# Altium PCB Flight_Computer_1.PcbDoc (part 4 of 4)
Units mm, origin at the board's own origin, x right, y up, seen from the top; angles counter-clockwise.
Board outline 101.6 x 76.2 mm, 4 copper layers (Top Layer, GND, 3.3V, Bottom Layer), stack 1.574 mm thick; 111 components, 86 nets, 493 pads, 1677 vias.
Unrouted connection lines stored in the file: 302.
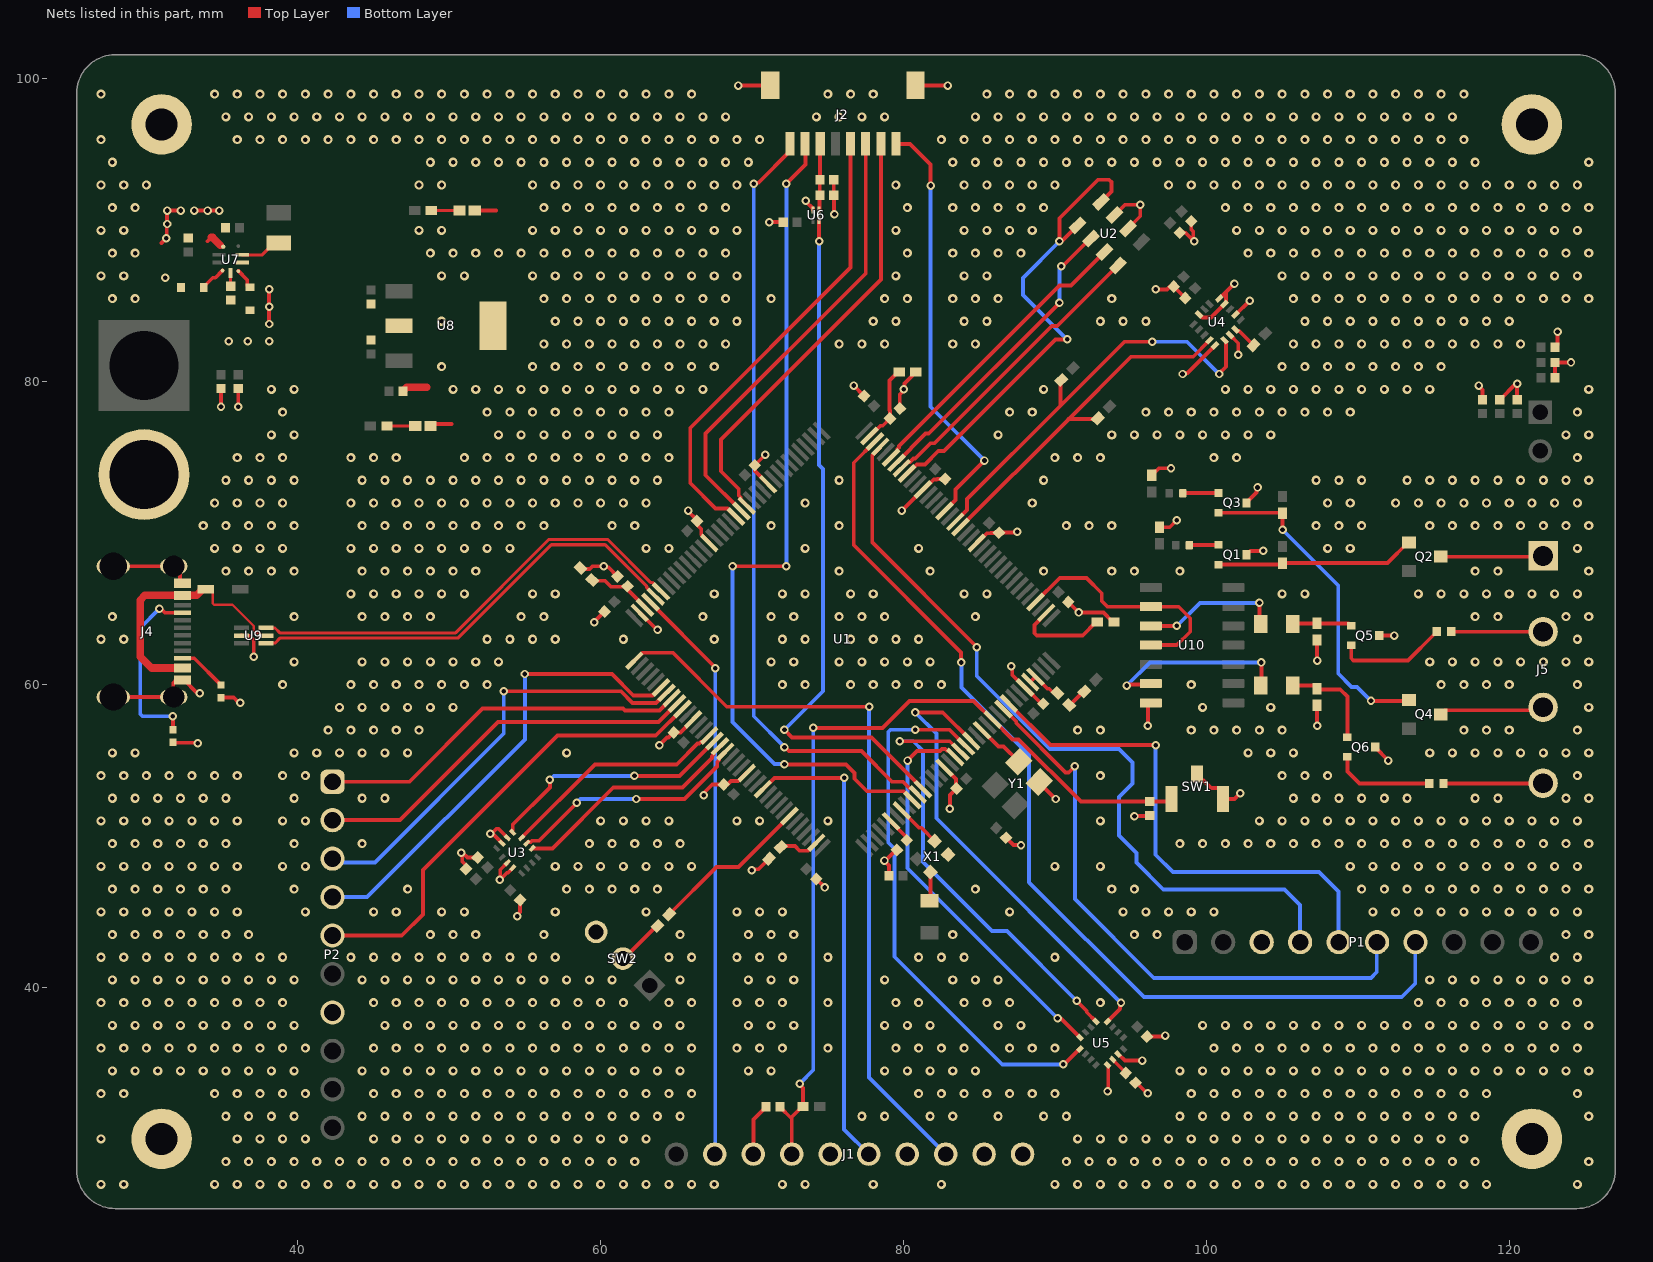
[diagram p4: the nets of this part, all layers, seen from the top]

## Via types
v1: diameter 0.6, hole 0.3, Top Layer to Bottom Layer, 1516 vias
v2: diameter 0.559, hole 0.305, Top Layer to Bottom Layer, 161 vias

## Nets (pads, with @x,y where several pads share a name; then routed paths per layer and width w, separated by ;. In a path a pad name is that pad's centre, name@x,y a point inside that pad or via, vN(x,y) a via of type N, cw(c..) or ccw(c..) an arc to the next point about the centre after c; other vN are vias at no path point) (continued)
GND: C1.1 C2.2 C3.1 C4.1 C5.1 C6.1 C7.1 C8.1 C9.1 C10.1 C11.1 C12.1 C13.1 C14.1 C15.2 C16.1 C17.2 C18.1 C19.1 C20.1 C21.2 C22.2 C23.1 C24.1 C25.1 C26.1 C27.1 C28.1 C29.2 C30.2 C31.2 C32.2 C33.2 C34.2 C35.2 C36.2 C37.2 C38.2 C39.2 C40.2 C41.2 C42.2 C43.2 C44.2 C45.2 D2.1 D3.1 H1.1 H2.1 H3.1 H4.1 J1.3 J1.5 J1.7 J1.9 J1.10 J2.9 J2.10 J3.N J4.A1B12 J4.B1A12 J4.S1 J4.S2 J4.S3 J4.S4 P1.3 P2.7 Q1.3 Q3.3 Q5.3 Q6.3 R5.2 R6.2 R11.1 R16.1 R18.1 R19.1 R22.2 R24.2 R25.2 R26.2 R28.2 R29.2 SW1.2 SW1.3 SW2.3 U1.16 U1.31 U1.51 U1.61 U1.83 U1.94 U1.107 U1.120 U1.130 U2.2 U2.3 U3.2 U3.3 U3.6 U3.7 U4.5 U4.7 U4.10 U4.12 U4.13 U4.16 U5.9 U5.11 U6.4 U7.1 U7.4 U8.2 U8.4 U9.2 U10.7 X1.2 Y1.2 | length 147.2
  Top Layer w0.254: J4.S4@27.65,59.18 31.65,59.18 31.777,59.307 31.777,60.127 31.95,60.3 32.225,60.3 32.5,60.3 33.305,59.494 33.47,59.494 v2(33.528,59.436) ; J4.S3@27.65,67.82 31.65,67.82 31.848,67.82 32.225,67.443 J4.A1B12@32.225,66.7 ; 30.994,89.16 v2(31.305,89.471) 31.337,89.503 31.337,90.392 v2(31.369,90.424) v2(31.369,91.313) v2(32.258,91.313) ; R28.2@31.75,56.195 31.78,56.164 33.371,56.164 v2(33.401,56.134) ; v2(33.147,91.313) v2(34.036,91.313) v2(34.798,91.313) ; 34.036,89.281 34.163,89.408 ; R29.2@34.925,59.149 35.765,59.149 36.113,58.801 v2(36.195,58.801) ; v2(34.925,78.359) C22.2@34.925,79.55 ; v2(36.068,78.359) C21.2@36.068,79.55 ; U9.2@36.279,63.246 36.302,63.223 36.806,63.223 37.084,62.945 v2(37.084,61.849) ; v2(38.1,83.82) v2(38.1,84.963) v2(38.1,86.106) ; D3.1@48.752,77.089 48.879,77.216 50.165,77.216 ; C5.1@51.11,47.823 51.117,47.83 51.117,48.075 50.858,48.333 50.858,48.837 v2(50.8,48.895) 50.882,48.895 51.199,48.578 51.865,48.578 C6.1@51.872,48.585 ; D2.1@51.681,91.313 53.086,91.313 ; U3.3@53.484,49.541 52.918,50.107 52.763,50.107 v2(52.705,50.165) 52.787,50.165 53.113,50.491 53.241,50.491 U3.2@53.837,49.894 ; U3.6@53.838,48.25 53.365,47.777 53.365,47.142 v2(53.34,47.117) 53.807,47.584 53.876,47.584 54.189,47.897 U3.7@54.192,47.897 ; v2(54.483,44.704) 54.483,44.786 54.674,44.978 54.674,45.769 C7.1@54.681,45.776 ; R22.2@58.666,67.699 58.719,67.646 59.279,67.646 59.451,67.818 v2(60.198,67.818) 60.256,67.76 60.51,67.76 C43.2@61.116,67.154 ; v2(59.563,64.135) C35.2@60.254,64.826 ; U1.107@62.573,64.751 62.602,64.751 63.726,63.627 v2(63.754,63.627) ; v2(63.881,56.007) 64.375,56.501 64.487,56.501 C36.2@64.826,56.84 ; C36.2@64.833,56.847 65.259,56.847 U1.120@66.109,57.697 ; v2(65.786,71.501) 65.786,71.445 66.365,70.866 66.365,70.566 66.642,70.289 66.642,69.908 67.17,69.38 U1.94@67.17,69.347 ; v2(66.802,52.705) 66.86,52.763 66.86,52.897 67.368,53.404 68.121,53.404 C33.2@68.128,53.411 68.372,53.411 68.595,53.634 69.084,53.634 69.612,54.162 U1.130@69.645,54.162 ; v2(69.088,99.568) 71.18,99.568 J2.10@71.2,99.588 ; v2(69.977,47.752) 70.035,47.81 70.416,47.81 R25.2@71.112,48.506 ; J1.3@70.08,29 70.08,31.287 70.914,32.121 C1.1@70.914,32.131 ; C38.2@70.175,74.493 v2(70.866,75.184) ; C38.2@70.182,74.486 70.182,74.113 U1.83@71.059,73.237 ; v2(71.12,90.551) C12.1@72.057,90.551 ; v2(73.533,91.948) 73.533,91.926 74.022,91.436 U6.4@74.022,91.353 ; C32.2@74.239,47.173 v2(74.803,46.609) ; C14.1@75.39,93.345 75.39,92.319 75.414,92.295 75.414,91.083 v2(75.438,91.059) ; v2(76.708,79.756) C31.2@77.399,79.065 ; C2.2@79.042,47.371 79.042,48.062 78.74,48.364 v2(78.74,48.387) 78.803,48.387 79.494,49.078 C45.2@79.558,49.078 ; C44.2@79.757,78.234 79.75,78.241 79.75,79.16 80.01,79.42 v2(80.01,79.502) 80.068,79.56 80.068,79.899 80.566,80.397 80.566,80.472 80.739,80.645 R24.2@80.814,80.645 ; v2(79.883,71.501) 79.898,71.501 81.28,72.883 U1.61@81.295,72.883 81.327,72.883 81.998,73.554 82.196,73.554 82.224,73.582 82.741,73.582 C30.2@82.748,73.589 ; J2.9@80.8,99.588 80.82,99.568 v2(82.931,99.568) ; U1.16@82.709,54.515 83.46,53.764 83.46,53.421 83.495,53.386 C40.2@83.495,53.142 83.058,52.705 v2(83.058,51.816) ; U1.51@84.83,69.347 84.863,69.347 85.513,69.998 85.752,69.998 85.78,70.026 86.297,70.026 C37.2@86.304,70.033 86.311,70.04 87.356,70.04 87.421,70.104 v2(87.503,70.104) ; C41.2@86.769,49.889 87.251,49.408 87.752,49.408 v2(87.757,49.403) ; v2(87.122,61.214) 87.18,61.156 87.18,60.651 U1.31@88.012,59.819 88.045,59.819 89.118,58.745 C29.2@89.225,58.745 ; Y1.2@88.953,53.573 88.953,53.541 v2(90.043,52.451) ; C34.2@90.876,65.461 v2(91.567,64.77) 93.194,64.77 93.432,64.532 93.432,64.523 93.82,64.135 R26.2@93.895,64.135 ; U5.9@93.462,34.89 93.516,34.836 93.516,33.191 v2(93.472,33.147) ; U2.3@93.935,91.009 94.62,91.694 v2(95.631,91.694) 95.631,90.937 U2.2@94.819,90.125 ; U5.11@94.169,35.597 94.205,35.597 94.623,35.179 v2(95.758,35.179) ; v2(95.25,51.308) 95.274,51.332 96.242,51.332 C42.2@96.266,51.356 ; C11.1@95.321,33.711 95.385,33.711 96.075,33.02 v2(96.139,33.02) ; C10.1@96.083,36.759 96.09,36.766 97.135,36.766 97.2,36.83 v2(97.282,36.83) ; v2(96.139,57.277) 96.139,58.628 96.312,58.801 U10.7@96.332,58.801 ; R16.1@96.393,73.829 96.393,73.904 96.566,74.077 96.641,74.077 96.859,74.295 v2(97.663,74.295) ; v2(96.647,86.106) 97.404,86.106 97.594,86.296 97.839,86.296 C8.1@97.846,86.289 C9.1@98.608,85.527 ; R11.1@96.901,70.4 97.578,70.4 v2(98.044,70.866) ; C4.1@98.242,89.845 98.249,89.852 98.494,89.852 98.501,89.845 98.623,89.845 v2(99.187,89.281) 99.129,89.339 99.129,89.936 98.997,90.067 98.997,90.6 C3.1@99.004,90.607 ; v2(98.425,80.518) 98.483,80.576 98.755,80.576 U4.5@100.57,82.391 ; SW1.3@99.392,54.101 99.392,53.951 99.665,53.678 99.815,53.678 100.319,53.174 100.819,53.174 101.092,52.901 SW1.2@101.092,52.451 101.854,52.451 v2(102.235,52.832) ; U4.16@99.509,84.442 99.541,84.442 99.742,84.241 100.298,84.241 U4.12@101.206,85.149 ; U4.13@100.852,85.503 100.861,85.503 101.353,85.995 ; U4.12@101.294,85.237 101.294,85.936 101.353,85.995 ; U4.7@101.56,83.098 102.108,82.55 v2(102.108,81.788) ; v2(101.854,86.487) 101.845,86.487 101.353,85.995 ; U4.10@101.913,84.442 101.941,84.442 102.843,85.344 v2(102.87,85.344) ; Q1.3@102.652,68.58 102.652,68.605 102.8,68.753 102.825,68.753 102.906,68.834 v2(103.759,68.834) ; Q3.3@102.652,72.009 102.652,72.034 103.32,72.702 103.32,72.967 v2(103.378,73.025) ; v2(107.315,57.277) R19.1@107.315,58.632 ; v2(107.315,61.595) R18.1@107.315,62.95 ; Q6.3@111.161,55.88 111.161,55.855 112.014,55.002 v2(112.014,54.991) ; Q5.3@111.415,63.246 v2(112.395,63.246) ; v2(117.983,79.756) 117.983,79.72 118.237,79.466 C24.1@118.237,78.819 ; C25.1@119.38,78.819 119.39,78.819 120.454,79.883 v2(120.523,79.883) C23.1@120.523,78.819 ; C28.1@123.015,80.264 C26.1@123.015,81.28 v2(124.079,81.28) ; C27.1@123.015,82.296 123.188,82.469 123.188,82.65 123.19,82.652 v2(123.19,83.312)
  Top Layer w0.5: 34.29,89.535 34.363,89.535 34.885,89.013 ; C19.1@46.942,79.375 46.942,79.385 46.992,79.435 47.002,79.435 47.196,79.629 48.514,79.629
  other v1: 27,27 28.5,27 34.5,27 36,27 37.5,27 39,27 40.5,27 42,27 43.5,27 45,27 46.5,27 48,27 49.5,27 51,27 52.5,27 54,27 55.5,27 57,27 58.5,27 60,27 61.5,27 63,27 64.5,27 66,27 67.5,27 72,27 73.5,27 78,27 82.5,27 90,27 91.5,27 93,27 94.5,27 96,27 97.5,27 99,27 100.5,27 102,27 103.5,27 105,27 106.5,27 108,27 109.5,27 111,27 112.5,27 114,27 115.5,27 117,27 118.5,27 124.5,27 35.25,28.5 36.75,28.5 38.25,28.5 39.75,28.5 41.25,28.5 42.75,28.5 44.25,28.5 45.75,28.5 47.25,28.5 48.75,28.5 50.25,28.5 51.75,28.5 53.25,28.5 54.75,28.5 56.25,28.5 57.75,28.5 59.25,28.5 60.75,28.5 62.25,28.5 90.75,28.5 92.25,28.5 93.75,28.5 95.25,28.5 96.75,28.5 98.25,28.5 99.75,28.5 101.25,28.5 102.75,28.5 104.25,28.5 105.75,28.5 107.25,28.5 108.75,28.5 110.25,28.5 111.75,28.5 113.25,28.5 114.75,28.5 116.25,28.5 117.75,28.5 125.25,28.5 27,30 36,30 37.5,30 39,30 40.5,30 45,30 46.5,30 48,30 49.5,30 51,30 52.5,30 54,30 55.5,30 57,30 58.5,30 60,30 61.5,30 63,30 91.5,30 93,30 94.5,30 96,30 97.5,30 99,30 100.5,30 102,30 103.5,30 105,30 106.5,30 108,30 109.5,30 111,30 112.5,30 114,30 115.5,30 117,30 35.25,31.5 36.75,31.5 38.25,31.5 39.75,31.5 44.25,31.5 45.75,31.5 47.25,31.5 48.75,31.5 50.25,31.5 51.75,31.5 53.25,31.5 54.75,31.5 56.25,31.5 57.75,31.5 59.25,31.5 60.75,31.5 62.25,31.5 63.75,31.5 65.25,31.5 77.25,31.5 78.75,31.5 81.75,31.5 83.25,31.5 86.25,31.5 89.25,31.5 90.75,31.5 98.25,31.5 99.75,31.5 101.25,31.5 102.75,31.5 104.25,31.5 105.75,31.5 107.25,31.5 108.75,31.5 110.25,31.5 111.75,31.5 113.25,31.5 114.75,31.5 116.25,31.5 117.75,31.5 125.25,31.5 27,33 28.5,33 34.5,33 36,33 37.5,33 39,33 40.5,33 45,33 46.5,33 48,33 49.5,33 51,33 52.5,33 54,33 55.5,33 57,33 58.5,33 60,33 61.5,33 63,33 64.5,33 66,33 81,33 82.5,33 84,33 85.5,33 87,33 88.5,33 90,33 99,33 100.5,33 102,33 103.5,33 105,33 106.5,33 108,33 109.5,33 111,33 112.5,33 114,33 115.5,33 117,33 118.5,33 124.5,33 27.75,34.5 29.25,34.5 30.75,34.5 32.25,34.5 33.75,34.5 35.25,34.5 36.75,34.5 38.25,34.5 39.75,34.5 44.25,34.5 45.75,34.5 47.25,34.5 48.75,34.5 50.25,34.5 51.75,34.5 53.25,34.5 54.75,34.5 56.25,34.5 57.75,34.5 59.25,34.5 60.75,34.5 62.25,34.5 63.75,34.5 65.25,34.5 69.75,34.5 71.25,34.5 78.75,34.5 80.25,34.5 81.75,34.5 83.25,34.5 84.75,34.5 98.25,34.5 99.75,34.5 101.25,34.5 102.75,34.5 104.25,34.5 105.75,34.5 107.25,34.5 108.75,34.5 110.25,34.5 111.75,34.5 113.25,34.5 114.75,34.5 116.25,34.5 117.75,34.5 119.25,34.5 120.75,34.5 122.25,34.5 123.75,34.5 125.25,34.5 27,36 28.5,36 30,36 31.5,36 33,36 34.5,36 36,36 37.5,36 39,36 40.5,36 45,36 46.5,36 48,36 49.5,36 51,36 52.5,36 54,36 55.5,36 57,36 58.5,36 60,36 61.5,36 63,36 64.5,36 66,36 69,36 70.5,36 72,36 75,36 79.5,36 81,36 82.5,36 84,36 87,36 88.5,36 90,36 100.5,36 102,36 103.5,36 105,36 106.5,36 108,36 109.5,36 111,36 112.5,36 114,36 115.5,36 117,36 118.5,36 120,36 121.5,36 123,36 124.5,36 27.75,37.5 29.25,37.5 30.75,37.5 32.25,37.5 33.75,37.5 35.25,37.5 36.75,37.5 38.25,37.5 39.75,37.5 45.75,37.5 47.25,37.5 48.75,37.5 50.25,37.5 51.75,37.5 53.25,37.5 54.75,37.5 56.25,37.5 57.75,37.5 59.25,37.5 60.75,37.5 62.25,37.5 63.75,37.5 65.25,37.5 69.75,37.5 71.25,37.5 72.75,37.5 78.75,37.5 80.25,37.5 81.75,37.5 86.25,37.5 87.75,37.5 99.75,37.5 101.25,37.5 102.75,37.5 104.25,37.5 105.75,37.5 107.25,37.5 108.75,37.5 110.25,37.5 111.75,37.5 113.25,37.5 114.75,37.5 116.25,37.5 117.75,37.5 119.25,37.5 120.75,37.5 122.25,37.5 123.75,37.5 125.25,37.5 27,39 28.5,39 30,39 31.5,39 33,39 34.5,39 36,39 37.5,39 39,39 45,39 46.5,39 48,39 49.5,39 51,39 52.5,39 54,39 55.5,39 57,39 58.5,39 60,39 61.5,39 64.5,39 66,39 69,39 70.5,39 72,39 75,39 79.5,39 81,39 84,39 85.5,39 87,39 93,39 114,39 115.5,39 117,39 118.5,39 120,39 121.5,39 123,39 124.5,39 27.75,40.5 29.25,40.5 30.75,40.5 32.25,40.5 33.75,40.5 35.25,40.5 36.75,40.5 38.25,40.5 39.75,40.5 44.25,40.5 45.75,40.5 47.25,40.5 48.75,40.5 50.25,40.5 51.75,40.5 53.25,40.5 54.75,40.5 56.25,40.5 57.75,40.5 59.25,40.5 60.75,40.5 65.25,40.5 69.75,40.5 71.25,40.5 72.75,40.5 78.75,40.5 83.25,40.5 84.75,40.5 86.25,40.5 114.75,40.5 116.25,40.5 117.75,40.5 119.25,40.5 120.75,40.5 122.25,40.5 123.75,40.5 125.25,40.5 27,42 28.5,42 30,42 31.5,42 33,42 34.5,42 36,42 37.5,42 39,42 43.5,42 45,42 46.5,42 48,42 49.5,42 51,42 52.5,42 54,42 55.5,42 57,42 64.5,42 66,42 69,42 70.5,42 72,42 75,42 81,42 82.5,42 84,42 90,42 123,42 124.5,42 27.75,43.5 29.25,43.5 30.75,43.5 32.25,43.5 33.75,43.5 35.25,43.5 36.75,43.5 48.75,43.5 50.25,43.5 51.75,43.5 56.25,43.5 65.25,43.5 69.75,43.5 71.25,43.5 72.75,43.5 83.25,43.5 95.25,43.5 96.75,43.5 123.75,43.5 125.25,43.5 27,45 28.5,45 30,45 31.5,45 33,45 34.5,45 36,45 40.5,45 45,45 46.5,45 49.5,45 51,45 57,45 63,45 69,45 70.5,45 72,45 87,45 94.5,45 96,45 97.5,45 99,45 100.5,45 111,45 112.5,45 114,45 115.5,45 117,45 118.5,45 120,45 121.5,45 123,45 124.5,45 27.75,46.5 29.25,46.5 30.75,46.5 32.25,46.5 33.75,46.5 35.25,46.5 39.75,46.5 47.25,46.5 57.75,46.5 59.25,46.5 60.75,46.5 62.25,46.5 63.75,46.5 84.75,46.5 93.75,46.5 95.25,46.5 110.25,46.5 111.75,46.5 113.25,46.5 114.75,46.5 116.25,46.5 117.75,46.5 119.25,46.5 120.75,46.5 122.25,46.5 123.75,46.5 125.25,46.5 27,48 28.5,48 30,48 31.5,48 33,48 34.5,48 36,48 39,48 40.5,48 57,48 58.5,48 60,48 61.5,48 63,48 64.5,48 66,48 90,48 93,48 109.5,48 111,48 112.5,48 114,48 115.5,48 117,48 118.5,48 120,48 121.5,48 123,48 124.5,48 27.75,49.5 29.25,49.5 30.75,49.5 32.25,49.5 33.75,49.5 35.25,49.5 39.75,49.5 44.25,49.5 59.25,49.5 60.75,49.5 62.25,49.5 63.75,49.5 65.25,49.5 98.25,49.5 99.75,49.5 101.25,49.5 102.75,49.5 104.25,49.5 105.75,49.5 107.25,49.5 108.75,49.5 110.25,49.5 111.75,49.5 113.25,49.5 114.75,49.5 116.25,49.5 117.75,49.5 119.25,49.5 120.75,49.5 122.25,49.5 123.75,49.5 125.25,49.5 27,51 28.5,51 30,51 31.5,51 33,51 34.5,51 36,51 39,51 40.5,51 60,51 61.5,51 63,51 64.5,51 69,51 70.5,51 75,51 93,51 103.5,51 105,51 106.5,51 108,51 109.5,51 111,51 112.5,51 114,51 115.5,51 117,51 118.5,51 120,51 121.5,51 123,51 124.5,51 27.75,52.5 29.25,52.5 30.75,52.5 32.25,52.5 33.75,52.5 35.25,52.5 39.75,52.5 44.25,52.5 45.75,52.5 105.75,52.5 107.25,52.5 108.75,52.5 110.25,52.5 111.75,52.5 113.25,52.5 117.75,52.5 119.25,52.5 123.75,52.5 125.25,52.5 27,54 28.5,54 30,54 31.5,54 33,54 34.5,54 36,54 39,54 40.5,54 93,54 105,54 106.5,54 108,54 124.5,54 27.75,55.5 29.25,55.5 39.75,55.5 41.25,55.5 42.75,55.5 44.25,55.5 45.75,55.5 47.25,55.5 57.75,55.5 102.75,55.5 104.25,55.5 105.75,55.5 114.75,55.5 116.25,55.5 117.75,55.5 119.25,55.5 120.75,55.5 122.25,55.5 123.75,55.5 125.25,55.5 42,57 43.5,57 45,57 46.5,57 48,57 91.5,57 93,57 99,57 100.5,57 102,57 103.5,57 105,57 117,57 118.5,57 120,57 124.5,57 42.75,58.5 44.25,58.5 45.75,58.5 47.25,58.5 48.75,58.5 50.25,58.5 99.75,58.5 104.25,58.5 125.25,58.5 39,60 43.5,60 45,60 46.5,60 48,60 49.5,60 51,60 52.5,60 72,60 73.5,60 76.5,60 78,60 79.5,60 81,60 82.5,60 99,60 115.5,60 117,60 118.5,60 120,60 124.5,60 39.75,61.5 44.25,61.5 45.75,61.5 47.25,61.5 48.75,61.5 50.25,61.5 51.75,61.5 53.25,61.5 71.25,61.5 72.75,61.5 75.75,61.5 77.25,61.5 78.75,61.5 80.25,61.5 81.75,61.5 114.75,61.5 116.25,61.5 117.75,61.5 119.25,61.5 120.75,61.5 122.25,61.5 123.75,61.5 125.25,61.5 27,63 28.5,63 52.5,63 54,63 55.5,63 57,63 61.5,63 67.5,63 72,63 73.5,63 76.5,63 78,63 79.5,63 81,63 124.5,63 27.75,64.5 39.75,64.5 44.25,64.5 45.75,64.5 47.25,64.5 48.75,64.5 54.75,64.5 56.25,64.5 66.75,64.5 71.25,64.5 72.75,64.5 75.75,64.5 77.25,64.5 78.75,64.5 84.75,64.5 117.75,64.5 119.25,64.5 123.75,64.5 125.25,64.5 43.5,66 45,66 46.5,66 48,66 49.5,66 51,66 55.5,66 57,66 67.5,66 72,66 73.5,66 76.5,66 78,66 84,66 85.5,66 105,66 106.5,66 114,66 115.5,66 117,66 118.5,66 120,66 121.5,66 123,66 124.5,66 35.25,67.5 36.75,67.5 38.25,67.5 39.75,67.5 44.25,67.5 45.75,67.5 47.25,67.5 48.75,67.5 50.25,67.5 51.75,67.5 75.75,67.5 81.75,67.5 89.25,67.5 93.75,67.5 95.25,67.5 98.25,67.5 117.75,67.5 119.25,67.5 125.25,67.5 34.5,69 36,69 37.5,69 39,69 43.5,69 45,69 46.5,69 48,69 49.5,69 51,69 52.5,69 54,69 63,69 64.5,69 73.5,69 81,69 108,69 109.5,69 124.5,69 33.75,70.5 35.25,70.5 36.75,70.5 38.25,70.5 39.75,70.5 44.25,70.5 45.75,70.5 47.25,70.5 48.75,70.5 50.25,70.5 51.75,70.5 53.25,70.5 54.75,70.5 56.25,70.5 60.75,70.5 62.25,70.5 71.25,70.5 75.75,70.5 90.75,70.5 92.25,70.5 93.75,70.5 107.25,70.5 108.75,70.5 110.25,70.5 114.75,70.5 116.25,70.5 117.75,70.5 119.25,70.5 120.75,70.5 122.25,70.5 123.75,70.5 125.25,70.5 34.5,72 36,72 37.5,72 39,72 43.5,72 45,72 46.5,72 48,72 49.5,72 51,72 52.5,72 54,72 55.5,72 57,72 58.5,72 60,72 61.5,72 63,72 73.5,72 88.5,72 108,72 109.5,72 112.5,72 114,72 115.5,72 117,72 118.5,72 120,72 121.5,72 123,72 124.5,72 35.25,73.5 36.75,73.5 38.25,73.5 39.75,73.5 44.25,73.5 45.75,73.5 47.25,73.5 48.75,73.5 50.25,73.5 51.75,73.5 53.25,73.5 54.75,73.5 56.25,73.5 57.75,73.5 59.25,73.5 60.75,73.5 62.25,73.5 63.75,73.5 75.75,73.5 89.25,73.5 107.25,73.5 108.75,73.5 110.25,73.5 113.25,73.5 114.75,73.5 116.25,73.5 117.75,73.5 119.25,73.5 120.75,73.5 122.25,73.5 123.75,73.5 125.25,73.5 36,75 37.5,75 39,75 43.5,75 45,75 46.5,75 51,75 52.5,75 54,75 55.5,75 57,75 58.5,75 60,75 61.5,75 63,75 64.5,75 90,75 91.5,75 93,75 100.5,75 102,75 124.5,75 38.25,76.5 39.75,76.5 53.25,76.5 54.75,76.5 56.25,76.5 57.75,76.5 59.25,76.5 60.75,76.5 62.25,76.5 63.75,76.5 86.25,76.5 93.75,76.5 95.25,76.5 96.75,76.5 98.25,76.5 99.75,76.5 101.25,76.5 102.75,76.5 104.25,76.5 123.75,76.5 125.25,76.5 39,78 52.5,78 54,78 55.5,78 57,78 58.5,78 60,78 61.5,78 63,78 64.5,78 87,78 88.5,78 96,78 97.5,78 99,78 100.5,78 102,78 103.5,78 105,78 106.5,78 108,78 109.5,78 124.5,78 38.25,79.5 39.75,79.5 50.25,79.5 51.75,79.5 53.25,79.5 54.75,79.5 56.25,79.5 57.75,79.5 59.25,79.5 60.75,79.5 62.25,79.5 63.75,79.5 65.25,79.5 66.75,79.5 89.25,79.5 101.25,79.5 102.75,79.5 104.25,79.5 105.75,79.5 107.25,79.5 108.75,79.5 110.25,79.5 111.75,79.5 113.25,79.5 114.75,79.5 125.25,79.5 49.5,81 55.5,81 57,81 58.5,81 60,81 61.5,81 63,81 64.5,81 66,81 67.5,81 105,81 106.5,81 108,81 109.5,81 111,81 112.5,81 114,81 115.5,81 56.25,82.5 57.75,82.5 59.25,82.5 60.75,82.5 62.25,82.5 63.75,82.5 65.25,82.5 66.75,82.5 68.25,82.5 75.75,82.5 77.25,82.5 78.75,82.5 83.25,82.5 84.75,82.5 105.75,82.5 107.25,82.5 108.75,82.5 110.25,82.5 111.75,82.5 113.25,82.5 114.75,82.5 116.25,82.5 117.75,82.5 119.25,82.5 120.75,82.5 49.5,84 57,84 58.5,84 60,84 61.5,84 63,84 64.5,84 66,84 67.5,84 69,84 78,84 79.5,84 84,84 85.5,84 93,84 94.5,84 96,84 106.5,84 108,84 109.5,84 111,84 112.5,84 114,84 115.5,84 117,84 118.5,84 120,84 27.75,85.5 29.25,85.5 56.25,85.5 57.75,85.5 59.25,85.5 60.75,85.5 62.25,85.5 63.75,85.5 65.25,85.5 66.75,85.5 68.25,85.5 71.25,85.5 78.75,85.5 80.25,85.5 83.25,85.5 84.75,85.5 86.25,85.5 93.75,85.5 105.75,85.5 107.25,85.5 108.75,85.5 110.25,85.5 111.75,85.5 113.25,85.5 114.75,85.5 116.25,85.5 117.75,85.5 119.25,85.5 120.75,85.5 122.25,85.5 123.75,85.5 125.25,85.5 27,87 28.5,87 49.5,87 51,87 55.5,87 57,87 58.5,87 60,87 61.5,87 63,87 64.5,87 66,87 67.5,87 69,87 79.5,87 84,87 85.5,87 105,87 106.5,87 108,87 109.5,87 111,87 112.5,87 114,87 115.5,87 117,87 118.5,87 120,87 121.5,87 123,87 124.5,87 27.75,88.5 29.25,88.5 48.75,88.5 50.25,88.5 51.75,88.5 53.25,88.5 54.75,88.5 56.25,88.5 57.75,88.5 59.25,88.5 60.75,88.5 62.25,88.5 63.75,88.5 65.25,88.5 66.75,88.5 68.25,88.5 80.25,88.5 83.25,88.5 84.75,88.5 86.25,88.5 87.75,88.5 102.75,88.5 104.25,88.5 105.75,88.5 107.25,88.5 108.75,88.5 110.25,88.5 111.75,88.5 113.25,88.5 114.75,88.5 116.25,88.5 117.75,88.5 119.25,88.5 120.75,88.5 122.25,88.5 123.75,88.5 125.25,88.5 27,90 28.5,90 48,90 49.5,90 55.5,90 57,90 58.5,90 60,90 61.5,90 63,90 64.5,90 66,90 67.5,90 69,90 79.5,90 84,90 85.5,90 87,90 88.5,90 102,90 103.5,90 105,90 106.5,90 108,90 109.5,90 111,90 112.5,90 114,90 115.5,90 117,90 118.5,90 120,90 121.5,90 123,90 124.5,90 27.75,91.5 29.25,91.5 56.25,91.5 57.75,91.5 59.25,91.5 60.75,91.5 62.25,91.5 63.75,91.5 65.25,91.5 66.75,91.5 68.25,91.5 80.25,91.5 83.25,91.5 84.75,91.5 86.25,91.5 87.75,91.5 89.25,91.5 101.25,91.5 102.75,91.5 104.25,91.5 105.75,91.5 107.25,91.5 108.75,91.5 110.25,91.5 111.75,91.5 113.25,91.5 114.75,91.5 116.25,91.5 117.75,91.5 119.25,91.5 120.75,91.5 122.25,91.5 123.75,91.5 125.25,91.5 27,93 28.5,93 30,93 48,93 49.5,93 55.5,93 57,93 58.5,93 60,93 61.5,93 63,93 64.5,93 66,93 67.5,93 69,93 79.5,93 84,93 85.5,93 87,93 88.5,93 90,93 97.5,93 99,93 100.5,93 102,93 103.5,93 105,93 106.5,93 108,93 109.5,93 111,93 112.5,93 114,93 115.5,93 117,93 118.5,93 120,93 121.5,93 123,93 124.5,93 27.75,94.5 48.75,94.5 50.25,94.5 51.75,94.5 53.25,94.5 54.75,94.5 56.25,94.5 57.75,94.5 59.25,94.5 60.75,94.5 62.25,94.5 63.75,94.5 65.25,94.5 66.75,94.5 68.25,94.5 69.75,94.5 83.25,94.5 84.75,94.5 86.25,94.5 87.75,94.5 89.25,94.5 90.75,94.5 92.25,94.5 93.75,94.5 95.25,94.5 96.75,94.5 98.25,94.5 99.75,94.5 101.25,94.5 102.75,94.5 104.25,94.5 105.75,94.5 107.25,94.5 108.75,94.5 110.25,94.5 111.75,94.5 113.25,94.5 114.75,94.5 116.25,94.5 117.75,94.5 125.25,94.5 27,96 36,96 37.5,96 39,96 40.5,96 42,96 43.5,96 45,96 46.5,96 48,96 49.5,96 51,96 52.5,96 54,96 55.5,96 57,96 58.5,96 60,96 61.5,96 63,96 64.5,96 66,96 67.5,96 69,96 70.5,96 82.5,96 84,96 85.5,96 87,96 88.5,96 90,96 91.5,96 93,96 94.5,96 96,96 97.5,96 99,96 100.5,96 102,96 103.5,96 105,96 106.5,96 108,96 109.5,96 111,96 112.5,96 114,96 115.5,96 117,96 35.25,97.5 36.75,97.5 38.25,97.5 39.75,97.5 41.25,97.5 42.75,97.5 44.25,97.5 45.75,97.5 47.25,97.5 48.75,97.5 50.25,97.5 51.75,97.5 53.25,97.5 54.75,97.5 56.25,97.5 57.75,97.5 59.25,97.5 60.75,97.5 62.25,97.5 63.75,97.5 65.25,97.5 66.75,97.5 68.25,97.5 74.25,97.5 75.75,97.5 77.25,97.5 78.75,97.5 84.75,97.5 86.25,97.5 87.75,97.5 89.25,97.5 90.75,97.5 92.25,97.5 93.75,97.5 95.25,97.5 96.75,97.5 98.25,97.5 99.75,97.5 101.25,97.5 102.75,97.5 104.25,97.5 105.75,97.5 107.25,97.5 108.75,97.5 110.25,97.5 111.75,97.5 113.25,97.5 114.75,97.5 116.25,97.5 27,99 34.5,99 36,99 37.5,99 39,99 40.5,99 42,99 43.5,99 45,99 46.5,99 48,99 49.5,99 51,99 52.5,99 54,99 55.5,99 57,99 58.5,99 60,99 61.5,99 63,99 64.5,99 66,99 75,99 76.5,99 78,99 85.5,99 87,99 88.5,99 90,99 91.5,99 93,99 94.5,99 96,99 97.5,99 99,99 100.5,99 102,99 103.5,99 105,99 106.5,99 108,99 109.5,99 111,99 112.5,99 114,99 115.5,99 117,99
  other v2: 35.433,82.677 36.703,82.677 38.1,82.677 31.242,86.868
NetC1_2: C1.2 C42.1 J1.4 R1.1 SW1.1 U1.25 | length 57.3
  Top Layer w0.254: C1.2@71.834,32.131 71.834,32.121 72.62,31.335 ; J1.4@72.62,29 72.62,31.335 ; v2(73.152,33.655) 73.152,33.573 73.364,33.361 R1.1@73.364,32.131 73.289,32.131 72.62,31.462 72.62,31.335 ; v2(74.041,57.15) 78.613,57.15 80.391,58.928 84.628,58.928 85.858,57.697 U1.25@85.891,57.697 87.198,56.39 87.597,56.39 91.711,52.276 C42.1@96.266,52.276 97.517,52.276 SW1.1@97.692,52.451
  Bottom Layer w0.254: v2(73.152,33.655) 74.041,34.544 v2(74.041,57.15)
NetC11_2: C11.2 U5.10 | length 1.2
  Top Layer w0.254: U5.10@93.816,35.244 93.816,35.23 94.671,34.375 C11.2@94.671,34.361
NetC13_2: C13.2 C14.2 J2.6 U6.3 | length 4.4
  Top Layer w0.254: U6.3@74.422,91.353 74.446,91.377 74.446,92.305 C13.2@74.47,92.329 C14.2@74.47,93.345 74.485,93.36 74.485,95.697 J2.6@74.5,95.712
NetC20_2: C20.2 U7.8 | length 0.9
  Top Layer w0.203: C20.2@35.56,86.312 U7.8@35.56,87.188
NetC43_1: C43.1 R22.1 U1.106 | length 4.3
  Top Layer w0.254: R22.1@59.444,66.921 59.497,66.868 60.278,66.868 60.677,66.469 61.487,66.469 61.514,66.497 61.568,66.497 62.927,65.137 U1.106@62.927,65.105
NetC44_1: C44.1 R24.1 U1.71 | length 5.2
  Top Layer w0.254: U1.71@77.759,76.419 77.792,76.419 78.475,77.102 78.625,77.102 C44.1@79.107,77.583 79.1,77.59 79.1,78.108 79.072,78.136 79.072,80.078 79.639,80.645 R24.1@79.714,80.645
NetD2_2: D2.2 R7.1 | length 1.9
  Top Layer w0.203: R7.1@48.81,91.313 D2.2@50.681,91.313
NetD3_2: D3.2 R8.1 | length 1.9
  Top Layer w0.203: R8.1@45.889,77.089 D3.2@47.752,77.089
NetFB1_2: FB1.2 R21.1 | length 1.4
  Top Layer w0.254: R21.1@90.94,58.666 90.996,58.666 91.885,59.555 FB1.2@91.94,59.555
NetJ1_2: J1.2 U1.105 | length 38.2
  Top Layer w0.254: U1.105@63.281,65.458 63.281,65.426 67.564,61.142 v2(67.564,61.087)
  Bottom Layer w0.254: J1.2@67.54,29 67.564,29.024 v2(67.564,61.087)
NetJ1_6: J1.6 U1.133 | length 31.2
  Top Layer w0.254: U1.133@70.705,53.101 70.738,53.101 71.485,53.848 v2(76.073,53.848)
  Bottom Layer w0.254: v2(76.073,53.848) 76.073,30.627 J1.6@77.7,29
NetJ1_8: J1.8 U1.109 | length 48.8
  Top Layer w0.254: U1.109@62.22,61.586 62.252,61.586 62.78,62.114 64.759,62.114 68.326,58.547 v2(77.724,58.547)
  Bottom Layer w0.254: v2(77.724,58.547) 77.724,34.056 J1.8@82.78,29
NetJ2_1: J2.1 U1.57 | length 28.3
  Top Layer w0.254: J2.1@79.5,95.712 80.437,95.712 81.788,94.361 v2(81.788,92.964) ; U1.57@82.709,71.469 83.439,72.199 83.439,72.899 v2(85.344,74.803)
  Bottom Layer w0.254: v2(81.788,92.964) 81.788,78.359 v2(85.344,74.803)
NetJ2_2: J2.2 U1.87 | length 29
  Top Layer w0.254: U1.87@69.645,71.822 69.229,72.238 69.229,72.374 69.117,72.486 69.117,72.926 67.945,74.097 67.945,76.2 78.5,86.755 J2.2@78.5,95.712
NetJ2_3: J2.3 U1.88 | length 29.6
  Top Layer w0.254: U1.88@69.291,71.469 66.929,73.831 66.929,76.581 77.5,87.152 J2.3@77.5,95.712
NetJ2_4: J2.4 U1.89 | length 30.7
  Top Layer w0.254: U1.89@68.937,71.115 68.905,71.115 68.377,71.643 67.579,71.643 65.913,73.309 65.913,76.962 76.5,87.549 J2.4@76.5,95.712
NetJ2_7: J2.7 U1.10 | length 56.5
  Top Layer w0.254: v2(68.707,67.818) v2(72.263,67.818) ; v2(72.136,54.737) 76.2,54.737 76.771,54.166 76.771,53.785 77.597,52.959 79.99,52.959 80.555,52.394 U1.10@80.588,52.394 ; v2(72.263,93.091) 73.533,94.361 73.533,95.679 J2.7@73.5,95.712
  Bottom Layer w0.254: v2(68.707,67.818) 68.707,57.531 71.476,54.762 72.111,54.762 v2(72.136,54.737) ; v2(72.263,67.818) v2(72.263,93.091)
NetJ2_8: J2.8 U1.11 | length 51.9
  Top Layer w0.254: v2(70.104,93.091) 70.162,93.149 70.412,93.149 72.5,95.237 J2.8@72.5,95.712 ; v2(72.136,55.88) 72.183,55.88 72.437,55.626 77.216,55.626 79.248,53.594 79.959,53.594 80.39,53.163 80.526,53.163 U1.11@80.941,52.747
  Bottom Layer w0.254: v2(70.104,93.091) 70.104,57.912 v2(72.136,55.88)
NetJ4_A5: J4.A5 R28.1 | length 12.1
  Top Layer w0.254: v2(30.861,65.024) 30.943,65.024 31.217,64.75 J4.A5@32.225,64.75 ; R28.1@31.75,57.023 v2(31.75,57.912)
  Bottom Layer w0.254: v2(30.861,65.024) 29.591,63.754 29.591,58.061 29.74,57.912 v2(31.75,57.912)
NetJ4_B5: J4.B5 R29.1 | length 3.4
  Top Layer w0.254: J4.B5@32.225,61.75 33.16,61.75 34.925,59.985 R29.1@34.925,59.977
NetJ5_1: J5.1 Q2.3 | length 6.8
  Top Layer w0.254: Q2.3@115.477,68.453 122.184,68.453 J5.1@122.231,68.5
NetJ5_2: J5.2 R13.2 | length 6.1
  Top Layer w0.254: R13.2@116.172,63.5 J5.2@122.231,63.5
NetJ5_3: J5.3 Q4.3 | length 6.9
  Top Layer w0.254: Q4.3@115.477,58.039 115.75,58.312 122.043,58.312 J5.3@122.231,58.5
NetJ5_4: J5.4 R14.2 | length 6.6
  Top Layer w0.254: R14.2@115.664,53.467 115.681,53.483 122.215,53.483 J5.4@122.231,53.5
NetL1_1: L1.1 U7.2 | length 2.7
  Top Layer w0.203: U7.2@36.323,88.388 37.653,88.388 38.435,89.17 L1.1@38.735,89.17
NetP1_4: P1.4 U1.69 | length 52.7
  Top Layer w0.254: U1.69@78.466,75.711 78.466,75.679 77.938,75.151 77.938,69.382 v2(84.836,62.484)
  Bottom Layer w0.254: v2(84.836,62.484) 84.836,60.579 89.662,55.753 94.234,55.753 95.123,54.864 95.123,53.467 94.234,52.578 94.234,50.038 95.377,48.895 95.377,48.26 97.155,46.482 105.156,46.482 106.19,45.448 P1.4@106.19,43
NetP1_5: P1.5 U1.28 | length 34.5
  Top Layer w0.254: U1.28@86.952,58.758 89.703,56.007 v2(96.647,56.007)
  Bottom Layer w0.254: v2(96.647,56.007) 96.647,48.768 97.79,47.625 107.442,47.625 108.73,46.337 P1.5@108.73,43
NetP1_6: P1.6 U1.27 | length 39.7
  Top Layer w0.254: U1.27@86.598,58.404 87.445,57.558 87.445,57.462 90.7,54.207 90.91,54.207 v2(91.313,54.61)
  Bottom Layer w0.254: v2(91.313,54.61) 91.313,45.847 96.52,40.64 110.871,40.64 111.252,41.021 111.252,42.982 P1.6@111.27,43
NetP1_7: P1.7 U1.70 | length 66.3
  Top Layer w0.254: U1.70@78.113,76.065 76.708,74.66 76.708,69.215 83.795,62.128 83.795,61.493 v2(83.82,61.468)
  Bottom Layer w0.254: v2(83.82,61.468) 83.82,59.817 88.29,55.347 88.29,46.948 95.869,39.37 112.903,39.37 113.792,40.259 113.792,42.982 P1.7@113.81,43
NetP2_1: P2.1 U1.116 | length 24.8
  Top Layer w0.254: P2.1@42.291,53.594 47.371,53.594 52.197,58.42 61.468,58.42 61.595,58.293 63.876,58.293 U1.116@64.695,59.111
NetP2_2: P2.2 U1.117 | length 25.9
  Top Layer w0.254: P2.2@42.291,51.054 46.736,51.054 53.213,57.531 63.821,57.531 U1.117@65.048,58.758
NetP2_3: P2.3 U1.115 | length 29.1
  Top Layer w0.254: v2(53.594,59.563) 61.341,59.563 62.103,58.801 63.645,58.801 64.309,59.465 U1.115@64.341,59.465
  Bottom Layer w0.254: P2.3@42.291,48.514 42.545,48.26 45.085,48.26 53.594,56.769 v2(53.594,59.563)
NetP2_4: P2.4 U1.114 | length 31.1
  Top Layer w0.254: v2(54.991,60.706) 60.737,60.706 62.152,59.29 63.427,59.29 63.955,59.819 U1.114@63.988,59.819
  Bottom Layer w0.254: P2.4@42.291,45.974 44.577,45.974 54.991,56.388 v2(54.991,60.706)
NetP2_5: P2.5 U1.118 | length 31
  Top Layer w0.254: P2.5@42.291,43.434 46.863,43.434 48.26,44.831 48.26,47.752 57.15,56.642 63.64,56.642 U1.118@65.402,58.404
NetQ1_1: Q1.1 R10.1 | length 1.9
  Top Layer w0.254: R10.1@98.875,69.215 98.882,69.222 100.794,69.222 Q1.1@100.802,69.23
NetQ1_2: Q1.2 Q2.1 R9.2 | length 13.2
  Top Layer w0.254: Q1.2@100.802,67.93 104.929,67.93 R9.2@105.029,68.03 111.954,68.03 113.327,69.403 Q2.1@113.377,69.403
NetQ3_1: Q3.1 R15.1 | length 2.4
  Top Layer w0.254: R15.1@98.436,72.644 98.443,72.651 100.794,72.651 Q3.1@100.802,72.659
NetQ3_2: Q3.2 Q4.1 R12.2 | length 21.8
  Top Layer w0.254: Q3.2@100.802,71.359 105.002,71.359 R12.2@105.029,71.332 v2(105.029,70.231) ; v2(110.871,58.928) 113.316,58.928 Q4.1@113.377,58.989
  Bottom Layer w0.254: v2(105.029,70.231) 108.712,66.548 108.712,60.728 109.583,59.857 109.942,59.857 v2(110.871,58.928)
NetQ5_1: Q5.1 R17.2 R18.2 | length 3.9
  Top Layer w0.254: R17.2@105.698,64.008 105.74,64.05 R18.2@107.315,64.05 109.386,64.05 109.54,63.896 Q5.1@109.565,63.896
NetQ5_2: Q5.2 R13.1 | length 7.4
  Top Layer w0.254: Q5.2@109.565,62.596 109.565,61.744 109.714,61.595 113.317,61.595 115.049,63.327 115.074,63.327 115.222,63.475 R13.1@115.222,63.5
NetQ6_1: Q6.1 R19.2 R20.2 | length 6.6
  Top Layer w0.254: R20.2@105.698,59.944 107.142,59.944 107.315,59.771 R19.2@107.315,59.732 107.357,59.69 108.839,59.69 109.311,59.218 Q6.1@109.311,56.53
NetQ6_2: Q6.2 R14.1 | length 6.7
  Top Layer w0.254: Q6.2@109.311,55.23 109.311,54.265 110.109,53.467 R14.1@114.714,53.467
NetR2_1: R2.1 U1.55 U4.6 | length 27.9
  Top Layer w0.254: U1.55@83.416,70.762 84.201,71.547 84.201,72.263 90.297,78.359 ; R2.1@90.416,80.129 90.363,80.076 90.363,78.425 90.297,78.359 ; v2(96.425,82.644) 94.582,82.644 90.297,78.359 ; v2(100.838,80.518) 100.838,80.539 101.294,80.996 101.294,82.657 U4.6@101.206,82.745
  Bottom Layer w0.254: v2(96.425,82.644) 98.712,82.644 v2(100.838,80.518)
NetR3_1: R3.1 U1.54 U4.4 | length 23.6
  Top Layer w0.254: U1.54@83.77,70.408 90.818,77.457 ; R3.1@92.829,77.589 92.776,77.536 90.898,77.536 90.818,77.457 ; U4.4@100.216,82.745 99.132,81.661 95.023,81.661 90.818,77.457
NetR4_1: R4.1 U4.8 | length 1.6
  Top Layer w0.254: U4.8@101.913,83.452 102.001,83.364 102.168,83.364 R4.1@103.116,82.415
NetR5_1: R5.1 U7.9 | length 1.4
  Top Layer w0.254: U7.9@36.069,87.31 36.657,86.722 36.657,86.356 36.78,86.233 R5.1@36.83,86.233
NetR6_1: R6.1 U7.7 | length 1.7
  Top Layer w0.254: R6.1@33.782,86.233 33.782,86.283 34.377,86.878 34.55,86.878 U7.7@35.023,87.351
NetR17_1: R17.1 U10.3 | length 9.2
  Top Layer w0.254: U10.3@96.332,63.881 v2(98.044,63.881) ; v2(103.505,65.405) 103.505,64.101 R17.1@103.598,64.008
  Bottom Layer w0.254: v2(98.044,63.881) 99.568,65.405 v2(103.505,65.405)
NetR20_1: R20.1 U10.6 | length 12.7
  Top Layer w0.254: v2(94.742,59.944) 94.8,60.002 96.263,60.002 U10.6@96.332,60.071 ; R20.1@103.598,59.944 103.632,59.978 v2(103.632,61.468)
  Bottom Layer w0.254: v2(94.742,59.944) 96.266,61.468 v2(103.632,61.468)
NetR21_2: R21.2 U1.32 U1.33 | length 2.4
  Top Layer w0.254: U1.32@88.366,60.172 U1.33@88.719,60.526 89.51,59.735 89.627,59.735 89.917,59.444 R21.2@90.162,59.444
NetR23_1: R23.1 U1.138 | length 10.6
  Top Layer w0.254: R23.1@64.524,44.839 67.651,47.966 69.106,47.966 U1.138@72.473,51.333
NetR23_2: R23.2 SW2.2 | length 3.2
  Top Layer w0.254: SW2.2@61.468,41.91 61.531,41.91 63.683,44.061 R23.2@63.746,44.061
NetR25_1: R25.1 U1.143 | length 2.7
  Top Layer w0.254: R25.1@71.89,49.284 71.943,49.337 72.829,49.337 73.129,49.037 73.68,49.037 74.208,49.565 U1.143@74.241,49.565
NetR26_1: R26.1 U1.38 | length 6.3
  Top Layer w0.254: U1.38@89.427,64.751 89.427,64.731 88.646,63.95 88.646,63.395 88.795,63.246 91.831,63.246 92.72,64.135 R26.1@92.795,64.135
NetR27_2: R27.2 X1.1 | length 1.9
  Top Layer w0.254: R27.2@81.706,45.728 81.772,45.794 X1.1@81.772,47.618
NetU1_8: U1.8 X1.3 | length 3
  Top Layer w0.254: U1.8@79.881,51.687 81.019,50.549 81.174,50.549 X1.3@82.058,49.664
NetU1_12: U1.12 U6.2 | length 45.6
  Top Layer w0.254: v2(72.136,57.023) 72.644,56.515 77.881,56.515 U1.12@81.295,53.101 ; v2(74.422,89.281) U6.2@74.422,90.678
  Bottom Layer w0.254: v2(72.136,57.023) 74.676,59.563 74.676,74.254 74.422,74.508 v2(74.422,89.281)
NetU1_18: U1.18 U5.4 | length 26.8
  Top Layer w0.254: v2(80.264,54.991) 80.899,55.626 82.418,55.626 82.542,55.75 82.752,55.75 82.865,55.638 83.001,55.638 U1.18@83.416,55.222 ; v2(90.17,37.973) 90.228,37.915 90.438,37.915 U5.4@91.659,36.693
  Bottom Layer w0.254: v2(80.264,54.991) 80.264,47.879 v2(90.17,37.973)
NetU1_19: U1.19 U5.1 | length 29.3
  Top Layer w0.254: v2(79.756,56.261) 83.052,56.261 83.737,55.576 U1.19@83.77,55.576 ; v2(91.44,39.116) 92.103,38.453 92.103,38.371 U5.1@92.72,37.754
  Bottom Layer w0.254: v2(79.756,56.261) 80.645,56.261 81.28,55.626 81.28,48.282 85.834,43.728 86.828,43.728 v2(91.44,39.116)
NetU1_20: U1.20 U5.5 | length 36.3
  Top Layer w0.254: v2(80.772,57.023) 83.03,57.023 U1.20@84.123,55.929 ; v2(90.551,34.925) 90.597,34.925 91.623,35.951 U5.5@91.659,35.951
  Bottom Layer w0.254: v2(80.772,57.023) 79.143,57.023 78.994,56.874 78.994,49.581 79.413,49.162 79.413,42.032 86.52,34.925 v2(90.551,34.925)
NetU1_21: U1.21 U5.16 | length 30.9
  Top Layer w0.254: v2(80.772,58.166) 82.594,58.166 U1.21@84.477,56.283 ; U5.16@93.462,37.754 94.303,38.594 94.303,38.931 v2(94.361,38.989)
  Bottom Layer w0.254: v2(80.772,58.166) 82.169,56.769 82.169,51.181 v2(94.361,38.989)
NetU1_23: U1.23 Y1.3 | length 3.3
  Top Layer w0.254: U1.23@85.184,56.99 86.261,55.913 86.613,55.913 Y1.3@87.609,54.917
NetU1_64: U1.64 U2.4 U2.5 | length 32.2
  Top Layer w0.254: U1.64@80.234,73.944 80.267,73.944 80.872,74.549 81.407,74.549 82.296,75.438 82.677,75.438 90.043,82.804 v2(90.805,82.804) ; U2.5@91.495,90.337 90.498,89.339 90.355,89.339 v2(90.297,89.281) 90.297,90.805 92.837,93.345 93.577,93.345 93.726,93.196 93.726,92.568 U2.4@93.051,91.893
  Bottom Layer w0.254: v2(90.297,89.281) 87.884,86.868 87.884,85.725 v2(90.805,82.804)
NetU1_65: U1.65 U2.8 | length 19.8
  Top Layer w0.254: U1.65@79.881,74.297 80.296,74.713 80.432,74.713 80.649,74.93 80.772,74.93 81.788,75.946 82.042,75.946 89.789,83.693 90.155,83.693 U2.8@94.147,87.685
NetU1_66: U1.66 U2.6 | length 20.3
  Top Layer w0.254: U1.66@79.527,74.651 81.457,76.581 81.661,76.581 v2(90.297,85.217) ; v2(90.424,87.63) 90.49,87.63 92.313,89.453 U2.6@92.379,89.453
  Bottom Layer w0.254: v2(90.297,85.217) 90.297,87.421 90.424,87.548 v2(90.424,87.63)
NetU1_67: U1.67 U2.7 | length 19.8
  Top Layer w0.254: U1.67@79.173,75.004 79.589,75.42 79.589,75.556 79.702,75.668 79.702,75.765 90.297,86.36 91.059,86.36 93.263,88.564 U2.7@93.263,88.569
NetU1_123: U1.123 U3.14 | length 15.2
  Top Layer w0.254: U3.14@54.774,49.893 59.618,54.737 65.024,54.737 66.396,56.109 66.506,56.109 66.618,56.221 66.754,56.221 U1.123@67.17,56.637
NetU1_124: U1.124 U3.1 | length 16.5
  Top Layer w0.254: U3.1@54.191,50.248 54.114,50.324 54.114,50.327 54.191,50.404 54.191,50.762 56.642,53.213 v2(56.642,53.721) ; v2(62.23,53.975) 65.215,53.975 U1.124@67.523,56.283
  Bottom Layer w0.254: v2(56.642,53.721) 56.896,53.975 v2(62.23,53.975)
NetU1_125: U1.125 U3.12 | length 15.3
  Top Layer w0.254: U3.12@55.481,49.186 56.806,49.186 60.833,53.213 65.405,53.213 67.349,55.157 67.349,55.266 67.461,55.378 67.461,55.514 U1.125@67.877,55.929
NetU1_126: U1.126 U3.13 | length 15.9
  Top Layer w0.254: U3.13@55.128,49.54 55.205,49.617 55.376,49.617 55.456,49.697 55.92,49.697 v2(58.42,52.197) ; v2(62.357,52.451) 65.532,52.451 67.702,54.621 67.702,54.912 67.815,55.025 67.815,55.16 U1.126@68.23,55.576
  Bottom Layer w0.254: v2(58.42,52.197) 58.674,52.451 v2(62.357,52.451)
"PYRO ARM": U1.40 U10.2 U10.4 | length 16.1
  Top Layer w0.254: U1.40@88.719,65.458 90.317,67.056 92.075,67.056 93.091,66.04 93.091,65.532 93.472,65.151 U10.2@96.332,65.151 98.171,65.151 98.933,64.389 98.933,63.5 98.044,62.611 U10.4@96.332,62.611
USB_D_N: U1.103 U9.6 | length 30.2
  Top Layer w0.202: U9.6@37.889,63.746 38.485,63.746 38.808,63.423 50.419,63.423 56.592,69.596 60.445,69.596 63.283,66.758 63.395,66.758 U1.103@63.988,66.165
USB_D_P: U1.104 U9.4 | length 29.9
  Top Layer w0.202: U9.4@37.889,62.746 38.485,62.746 38.808,63.069 50.566,63.069 56.739,69.242 60.298,69.242 63.041,66.499 63.041,66.405 U1.104@63.634,65.812
UVBUS: D1.2 J4.A4B9 J4.B4A9 U9.5 | length 16.9
  Top Layer w0.152: D1.2@34.179,66.294 34.378,66.095 34.378,65.367 34.468,65.278 35.679,65.278 37.084,63.873 37.084,63.619 37.31,63.393 37.397,63.393 37.544,63.246 U9.5@37.889,63.246
  Top Layer w0.5: J4.B4A9@32.225,61.1 30.34,61.1 29.591,61.849 29.591,65.586 29.905,65.9 32.225,65.9 33.327,65.9 33.619,66.193 33.619,66.269 33.644,66.294 D1.2@33.912,66.294
VBAT: C45.1 U1.6 | length 1.7
  Top Layer w0.254: U1.6@79.173,50.98 79.173,50.947 80.208,49.912 C45.1@80.208,49.728
pads on no net: J2.5 J4.A8 J4.B8 P1.2 P1.8 P1.9 P1.10 P2.8 P2.9 P2.10 U1.1 U1.2 U1.3 U1.4 U1.5 U1.7 U1.9 U1.13 U1.14 U1.15 U1.22 U1.24 U1.26 U1.29 U1.34 U1.36 U1.37 U1.42 U1.43 U1.44 U1.45 U1.48 U1.49 U1.50 U1.53 U1.56 U1.58 U1.59 U1.60 U1.63 U1.68 U1.73 U1.74 U1.75 U1.76 U1.77 U1.78 U1.79 U1.80 U1.81 U1.82 U1.85 U1.86 U1.90 U1.91 U1.92 U1.93 U1.96 U1.97 U1.98 U1.99 U1.100 U1.101 U1.102 U1.110 U1.111 U1.112 U1.113 U1.119 U1.122 U1.127 U1.128 U1.129 U1.132 U1.134 U1.135 U1.136 U1.137 U1.139 U1.140 U1.141 U1.142 U3.4 U3.9 U3.10 U3.11 U4.2 U4.3 U4.9 U4.11 U5.3 U5.6 U5.7 U5.8 U5.12 U5.14 U5.15 U10.8 U10.9 U10.10 U10.11 U10.12 U10.13

## Polygon pours and split planes (outlines as drawn)
GND on Top Layer "Top GND Pour" (solid, remove dead copper, pour order 9): 25.717,101.854 25.971,102.108 126.936,102.108 126.936,23.749 126.301,23.114 26.987,23.114 25.845,24.257
5V on Top Layer "5V_L01_P000" (solid, pour order 0): 35.687,88.9 35.814,89.027 35.814,95.123 46.863,95.123 46.863,89.027
3V3 on Top Layer "3V3_L01_P008" (solid, pour order 8): 44.069,82.296 46.228,82.296 46.228,80.137 46.482,80.137 46.482,77.851 44.069,77.851
GND on Top Layer "GND_L01_P007" (solid, pour order 7): 42.418,82.677 42.418,85.344 46.101,85.344 46.228,85.217 46.228,82.677
5V on Top Layer "5V_L01_P006" (solid, pour order 6): 44.069,89.281 44.069,85.598 45.339,85.598 45.339,89.281
GND on Top Layer "GND_L01_P004" (solid, pour order 4): 48.133,88.646 48.133,79.248 55.499,79.248 55.626,79.121 55.626,88.646
GND on Top Layer "GND_L01_P003" (solid, pour order 3): 35.433,89.535 35.433,88.9 26.035,88.9 26.162,89.027 26.162,99.568 35.433,99.568 35.56,99.441
GND on Top Layer "GND_L01_P001" (solid, pour order 1): 40.894,88.138 36.83,88.138 36.83,85.725 34.417,85.852 34.417,83.185 40.894,83.185 40.894,85.852 40.894,86.106
GND on Bottom Layer "NONET_L02_P-001" (solid, remove dead copper, pour order 11): 127.254,100.965 127.381,100.838 127.381,24.638 127.254,24.511 127,24.765 25.146,24.765 25.146,100.965
3V3 on 3.3V (split plane): 119.124,96.212 119.124,73.025 119.133,72.975 119.161,72.933 119.669,72.425 119.711,72.397 119.761,72.388 126.236,72.388 126.245,72.34 126.273,72.298 126.315,72.27 126.365,72.261 126.415,72.27 126.457,72.298 126.485,72.34 126.49,72.365 126.49,27.94 126.491,27.924 126.482,27.741 126.453,27.544 126.404,27.35 126.337,27.162 126.252,26.982 126.149,26.811 126.031,26.651 125.897,26.503 125.749,26.369 125.589,26.251 125.418,26.148 125.238,26.063 125.05,25.996 124.856,25.947 124.659,25.918 124.476,25.909 124.46,25.91 27.94,25.91 27.924,25.909 27.741,25.918 27.544,25.947 27.35,25.996 27.162,26.063 26.982,26.148 26.811,26.251 26.651,26.369 26.503,26.503 26.369,26.651 26.251,26.811 26.148,26.982 26.063,27.162 25.996,27.35 25.947,27.544 25.918,27.741 25.909,27.924 25.91,27.94 25.91,77.445 25.915,77.42 25.943,77.378 25.985,77.35 26.035,77.341 33.909,77.341 33.959,77.35 34.001,77.378 34.029,77.42 34.038,77.47 34.029,77.52 34.001,77.562 33.784,77.778 33.784,96.974 33.836,97.026 118.31,97.026
BATT on 3.3V (split plane): 126.236,99.641 126.236,72.646 119.815,72.646 119.382,73.079 119.382,96.266 119.373,96.316 119.345,96.358 118.456,97.247 118.414,97.275 118.364,97.284 33.782,97.284 33.732,97.275 33.69,97.247 33.563,97.12 33.535,97.078 33.526,97.028 33.526,77.724 33.535,77.674 33.563,77.632 33.596,77.599 26.164,77.599 26.164,100.022 26.978,100.836 125.041,100.836
3V3 on 3.3V (split plane): 125.418,100.852 125.589,100.749 125.749,100.631 125.897,100.497 126.031,100.349 126.149,100.189 126.252,100.018 126.276,99.967 125.367,100.876
GND on GND (split plane): 124.659,101.082 124.856,101.053 125.05,101.004 125.238,100.937 125.418,100.852 125.589,100.749 125.749,100.631 125.897,100.497 126.031,100.349 126.149,100.189 126.252,100.018 126.337,99.838 126.404,99.65 126.453,99.456 126.482,99.259 126.491,99.076 126.49,99.06 126.49,27.94 126.491,27.924 126.482,27.741 126.453,27.544 126.404,27.35 126.337,27.162 126.252,26.982 126.149,26.811 126.031,26.651 125.897,26.503 125.749,26.369 125.589,26.251 125.418,26.148 125.238,26.063 125.05,25.996 124.856,25.947 124.659,25.918 124.476,25.909 124.46,25.91 27.94,25.91 27.924,25.909 27.741,25.918 27.544,25.947 27.35,25.996 27.162,26.063 26.982,26.148 26.811,26.251 26.651,26.369 26.503,26.503 26.369,26.651 26.251,26.811 26.148,26.982 26.063,27.162 25.996,27.35 25.947,27.544 25.918,27.741 25.909,27.924 25.91,27.94 25.91,99.06 25.909,99.076 25.918,99.259 25.947,99.456 25.996,99.65 26.063,99.838 26.148,100.018 26.251,100.189 26.369,100.349 26.503,100.497 26.651,100.631 26.811,100.749 26.982,100.852 27.162,100.937 27.35,101.004 27.544,101.053 27.741,101.082 27.924,101.091 27.94,101.09 124.46,101.09 124.476,101.091

## Other copper
3.3V (plane layer: these items are gaps in the copper):
  lines w0.254: 126.365,72.39 126.365,99.695 125.095,100.965 65.532,100.965 26.924,100.965 26.035,100.076 26.035,77.47 33.909,77.47 33.655,77.724 33.655,97.028 33.782,97.155 118.364,97.155 119.253,96.266 119.253,73.025 119.761,72.517 126.619,72.517 126.746,72.644

## Silkscreen, mask and mechanical layers (free items; w line width, h text height)
Top Overlay:
  text "GPS" at 82.931,96.901 h1.52
  text "Barometer" at 96.901,92.583 h0.5
  text "5V LED" at 49.657,89.662 h0.5
  text "Accelerometer" at 104.013,85.725 h0.5
  text "3.3V LED" at 47.879,78.105 h0.5
  text "Designed By George E" at 105.41,76.113 h0.5
  text "& Andrew B - PSP 26" at 105.41,74.803 h0.5
  text "LoRa" at 46.355,45.847 h1.52 r90
  text "Boot from Flash" at 61.314,45.693 h0.25
  text "IMU" at 49.276,42.672 h1.52
  text "SD CARD" at 97.409,39.116 h1.52
  text "Boot to Program" at 65.139,36.818 h0.25
  text "JTAG" at 76.708,32.258 h1.52
  text "Magnetometer" at 91.186,31.409 h0.5
Mechanical 1:
  the board outline again, w0.508

## Text inside footprints (layer, text, board x,y; h text height)
U5: Mechanical 13 "*" at 92.564,37.365 h1.27 r315